# Altium PCB SB0037A.PcbDoc (part 7 of 7)
Units mil, origin at the board's own origin, x right, y up, seen from the top; angles counter-clockwise.
Board outline 2872.5 x 4560 mil, 6 copper layers (Top Layer, L2, L3, L4, L5, Bottom Layer), stack 30.268 mil thick; 282 components, 292 nets, 1320 pads, 687 vias.
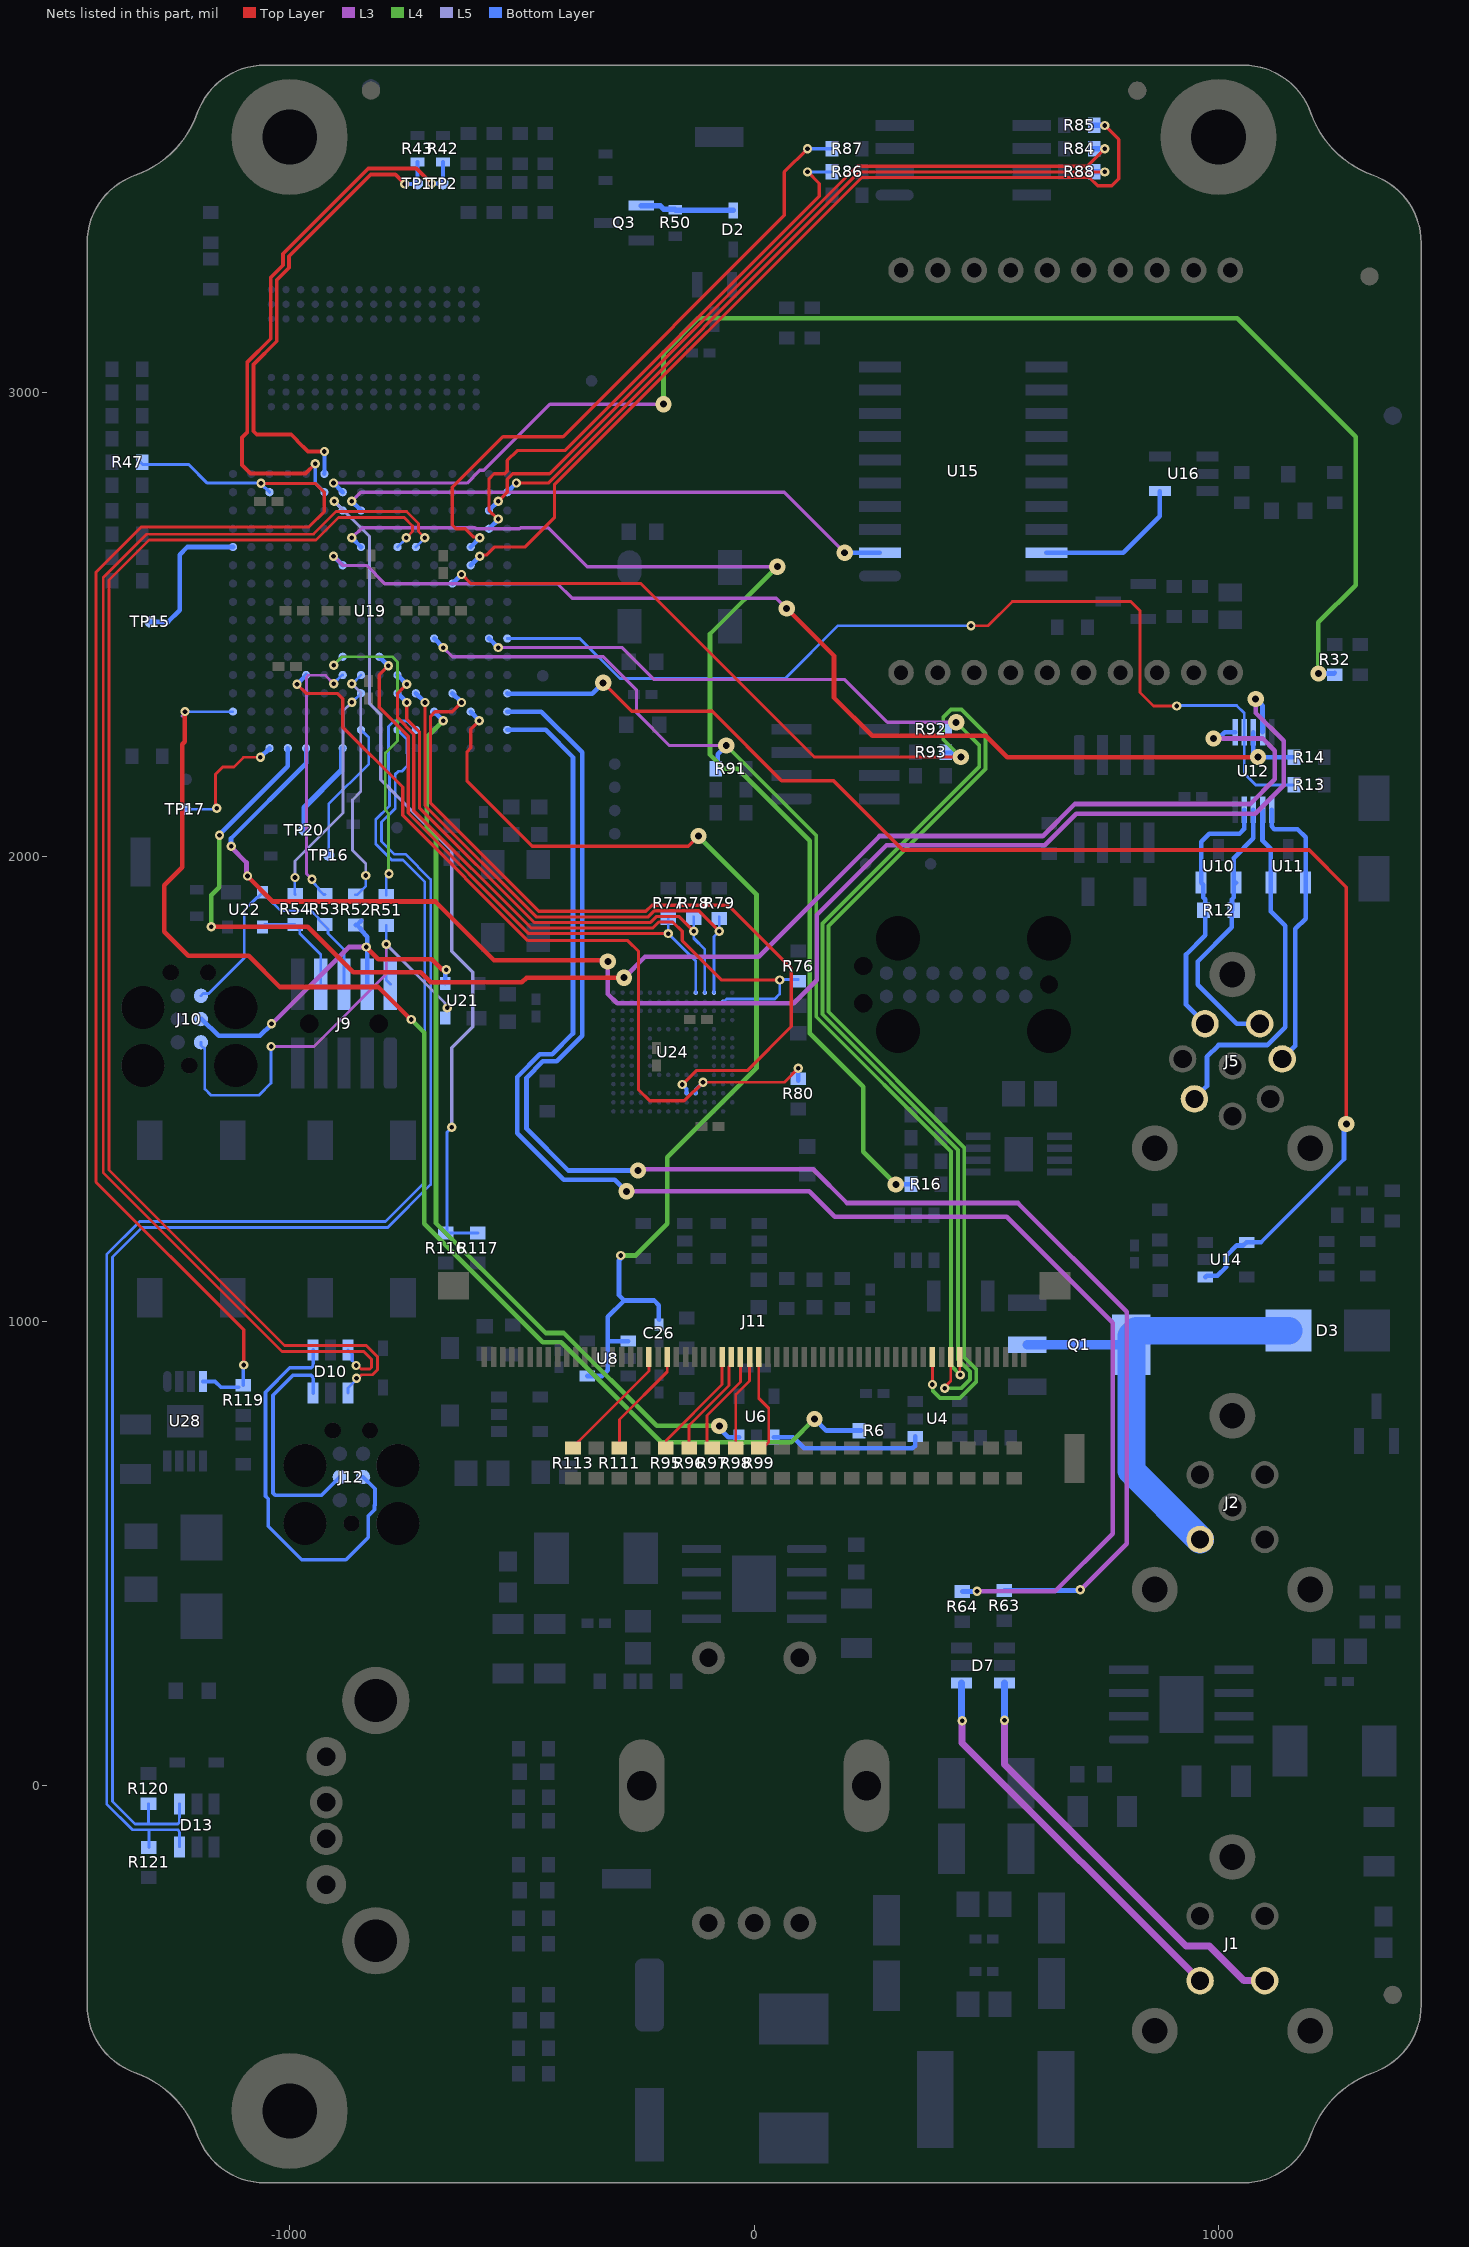
[diagram p9: the nets of this part, all layers, seen from the top]

## Via types
v1: diameter 20, hole 10, Top Layer to Bottom Layer, tented both sides, 484 vias
v2: diameter 35, hole 15, Top Layer to Bottom Layer, tented both sides, 197 vias
v3: diameter 20, hole 10, Top Layer to Bottom Layer, tented top, 6 vias

## Nets (pads, with @x,y where several pads share a name; then routed paths per layer and width w, separated by ;. In a path a pad name is that pad's centre, name@x,y a point inside that pad or via, vN(x,y) a via of type N, cw(c..) or ccw(c..) an arc to the next point about the centre after c; other vN are vias at no path point) (continued)
NetTP15_1: TP15.1 U19.T12 | length 315.1
  Bottom Layer w10: TP15.1@-1300,2506 -1262,2506 -1237,2531 -1237,2651 -1220.68,2667.32 U19.T12@-1122.05,2667.32
NetTP16_1: TP16.1 U19.J2 | length 312.6
  Bottom Layer w6: TP16.1@-916,2004 -916,2114 -829.6,2200.4 -829.6,2257.08 -833.51,2261 -833.83,2261 U19.J2@-846.46,2273.62
NetTP17_1: TP17.1 U19.P1 | length 283.1
  Top Layer w6: v1(-1157,2105) -1160,2108 -1160,2178 -1144,2194 -1120,2194 -1099.43,2214.57 v1(-1062.99,2214.57)
  Bottom Layer w5: TP17.1@-1225,2103 -1159,2103 v1(-1157,2105)
  Bottom Layer w10: v1(-1062.99,2214.57) U19.P1@-1043.31,2234.25
NetTP20_1: TP20.1 U19.K1 | length 210.7
  Bottom Layer w12: TP20.1@-969,2058 -969,2106 -888.14,2186.86 -888.14,2227.89 -886.92,2229.12 -886.92,2233.16 U19.K1@-885.83,2234.25
NetU4_1: U4.1 U6.1 | length 336.7
  Bottom Layer w10: U6.1@42.4,750.71 84.29,750.71 108.23,726.77 340.91,726.77 346.77,732.63 U4.1@346.77,752.6
NetU15_19: U15.19 U16.4 | length 330.9
  Bottom Layer w10: U15.19@629.13,2655 795,2655 873.42,2733.42 U16.4@873.42,2787.6
PCLK: J11.40 R111.1 | length 242.3
  Top Layer w6: R111.1@-290,723.54 -290,788.74 -187.01,891.73 J11.40@-187.01,923.23
POR: D2.2 Q3.1 R50.2 | length 201.9
  Bottom Layer w12: Q3.1@-242.6,3402.4 -202.4,3402.4 -194.8,3394.8 -171.26,3394.8 R50.2@-170,3393.54 -168.58,3392.13 D2.2@-44.99,3392.13
R0: J11.34 R95.1 | length 249.8
  Top Layer w6: R95.1@-190,723.54 -188.98,724.57 -188.98,744.09 -68.9,864.17 J11.34@-68.9,923.23
R1: J11.33 R96.1 | length 237.3
  Top Layer w6: R96.1@-140,723.54 -140,776.1 -53.99,862.11 -53.99,902.7 -49.21,907.48 J11.33@-49.21,923.23
R2: J11.32 R97.1 | length 234.3
  Top Layer w6: R97.1@-90,723.54 -101.5,735.04 -101.5,797.63 -29.53,869.6 J11.32@-29.53,923.23
R3: J11.31 R98.1 | length 212.2
  Top Layer w6: R98.1@-40,723.54 -39.37,724.17 -39.37,842.52 -9.84,872.05 J11.31@-9.84,923.23
R4: J11.30 R99.1 | length 220.4
  Top Layer w6: J11.30@9.84,923.23 9.84,834.63 31.5,812.97 31.5,740.12 14.92,723.54 R99.1@10,723.54
RXN_0: J5.2 R12.2 U10.1 U12.8 | length 601.4
  Bottom Layer w10: U10.1@1037.4,1944.57 U10.1@1032.66,1939.83 ; U12.8@1075,2101.34 1075,2040 1032.66,1997.66 U10.1@1032.66,1939.83 ; J5.2@1088.77,1640.85 1039.15,1640.85 955,1725 955,1775 1028.54,1848.54 1028.54,1885 1028.91,1885.36 1028.91,1908.91 1032.66,1912.66 U10.1@1032.66,1939.83
RXP_0: J5.1 R12.1 U10.2 U12.9 | length 574.7
  Bottom Layer w10: J5.1@970.83,1640.85 930,1681.68 930,1790 971.46,1831.46 971.46,1885 971.09,1885.36 971.09,1908.91 967.34,1912.66 967.34,1939.83 U10.2@962.6,1944.57 962.6,2032.6 980,2050 1045,2050 1055.31,2060.31 U12.9@1055.31,2101.34
SCL: R42.2 TP2.1 U19.L15 | length 1214.7
  Top Layer w8: v1(-944.93,2846.6) -965.74,2825.79 -1084.39,2825.79 -1102.68,2844.08 -1102.68,2903.32 -1091.07,2914.93 -1091.07,3065.64 -1040.87,3115.84 -1040.87,3247.77 -1014.45,3274.2 -1014.45,3298.54 -830.71,3482.28 -726.97,3482.28 v1(-694.68,3450)
  Bottom Layer w8: v1(-944.93,2846.6) -944.93,2805.16 U19.L15@-925.2,2785.43 ; v1(-694.68,3450) TP2.1@-670,3450 R42.2@-670,3496.46
SD_CLK: U19.D4 U24.M6 | length 1663.5
  Top Layer w7: v1(-629.92,2332.68) -649.79,2312.81 -687.19,2312.81 -696.66,2303.34 -696.66,2115.6 -464.06,1883 -232.91,1883 -219.91,1896 -56,1896 80,1760 80,1635 -15,1540 -125,1540 v1(-155,1510)
  Bottom Layer w8: v1(-155,1510) -145.47,1500.47 U24.M6@-145.47,1491.42
  Bottom Layer w10: U19.D4@-649.61,2352.36 v1(-629.92,2332.68)
SD_CMD: R80.1 U19.M5 U24.M5 | length 1810.1
  Top Layer w6: v1(-110,1515) 65,1515 v1(95,1545)
  Top Layer w7: v1(-984.25,2372.05) -964.38,2352.18 -897.44,2352.18 -885.64,2340.38 -885.64,2279.64 -756.66,2150.66 -756.66,2089.69 -486.97,1820 -272,1820 -249,1797 -249,1499 -225,1475 -150,1475 v1(-110,1515)
  Bottom Layer w8: U24.M5@-125.79,1491.42 -125.79,1499.21 v1(-110,1515)
  Bottom Layer w10: v1(-984.25,2372.05) U19.M5@-964.57,2391.73 ; R80.1@95,1518.54 v1(95,1545)
SD_DATA0: R79.1 U19.F4 U24.A3 | length 1174.6
  Top Layer w7: v1(-708.66,2332.68) -708.66,2110.63 -469.03,1871 -227.94,1871 -214.94,1884 -119,1884 v1(-75,1840)
  Bottom Layer w6: U24.A3@-86.42,1707.95 -86.42,1828.58 v1(-75,1840) R79.1@-75,1871.46
  Bottom Layer w10: U19.F4@-728.35,2352.36 v1(-708.66,2332.68)
SD_DATA1: R78.1 U19.G4 U24.A4 | length 1151.1
  Top Layer w7: v1(-748.03,2332.68) -748.03,2296.97 -720.66,2269.6 -720.66,2105.66 -474,1859 -222.97,1859 -209.97,1872 -162,1872 v1(-130,1840)
  Bottom Layer w6: R78.1@-130,1871.46 v1(-130,1840) -130,1825 -106.1,1801.1 U24.A4@-106.1,1707.95
  Bottom Layer w10: U19.G4@-767.72,2352.36 v1(-748.03,2332.68)
SD_DATA2: R77.1 U19.H6 U24.A5 | length 1233.7
  Top Layer w7: v1(-787.4,2411.42) -806.9,2391.92 -806.9,2321.9 -744.66,2259.66 -744.66,2094.66 -485,1835 v1(-185,1835)
  Bottom Layer w6: R77.1@-185,1871.46 v1(-185,1835) -125.79,1775.79 U24.A5@-125.79,1707.95
  Bottom Layer w10: U19.H6@-807.09,2431.1 v1(-787.4,2411.42)
SD_DATA3: R76.1 U19.G5 U24.B2 | length 1483.4
  Top Layer w7: v1(-748.03,2372.05) -767.72,2352.36 -767.72,2299.69 -732.66,2264.63 -732.66,2099.63 -480.03,1847 -218,1847 -205,1860 -175,1860 -155,1840 -155,1820 -70,1735 v1(55,1735)
  Bottom Layer w6: U24.B2@-66.73,1688.27 -65.75,1688.27 -59.61,1694.41 44.41,1694.41 55,1705 v1(55,1735) 56.46,1736.46 R76.1@95,1736.46
  Bottom Layer w10: U19.G5@-767.72,2391.73 v1(-748.03,2372.05)
SDA: R43.2 TP1.1 U19.L16 | length 1033
  Top Layer w8: v1(-925.2,2873.03) -960.63,2873.03 -983.99,2896.39 -983.99,2897.2 -996.44,2909.66 -1071.08,2909.66 -1078.07,2916.65 -1078.07,3060.26 -1027.87,3110.46 -1027.87,3242.39 -1001.45,3268.81 -1001.45,3293.16 -825.32,3469.28 -772.43,3469.28 v1(-751.97,3448.82)
  Bottom Layer w8: U19.L16@-925.2,2824.8 -924.88,2825.12 -924.88,2872.72 v1(-925.2,2873.03) ; v1(-751.97,3448.82) -726.18,3448.82 TP1.1@-725,3450 R43.2@-725,3496.46
SENSOR_CUR_FB: U14.1 U14.4 U19.A4 | length 3004
  Top Layer w8: v2(-325,2375) -263.5,2313.5 -90.3,2313.5 59.2,2164 171,2164 320,2015 1195,2015 1275,1935 v2(1275,1425)
  Bottom Layer w8: 1091.4,1170.4 1270,1349
  Bottom Layer w10: U19.A4@-531.5,2352.36 -530.18,2351.05 -348.95,2351.05 v2(-325,2375) ; U14.1@971.71,1095.6 974.69,1098.58 997.58,1098.58 1016,1117 1016,1140 1039.59,1163.59 1053.48,1163.59 U14.4@1060.29,1170.4 1091.4,1170.4 ; 1270,1349 1270,1406.64 1270.22,1406.86 1270.22,1420.22 v2(1275,1425)
SENSOR_ENABLE: R16.1 U19.J12 | length 2599.4
  L3 w7: v1(-866.14,2687.01) -844.15,2709 -600.75,2709 -598.63,2706.88 -505.1,2706.88 -502.98,2709 -443.6,2709 -359.6,2625 v2(50,2625)
  L4 w10: v2(50,2625) -95,2480 -95,2220 -65,2190 -35,2190 120,2035 120,1620 235,1505 235,1365 v2(305,1295)
  Bottom Layer w10: v1(-866.14,2687.01) U19.J12@-846.46,2667.32 ; v2(305,1295) R16.1@341.46,1295
SENSOR_RX_EN: R13.2 U12.2 U19.A7 | length 2142.3
  Top Layer w6: v1(467,2498) 504,2498 556,2550 811,2550 831,2530 831,2354 860,2325 v1(910,2325)
  Bottom Layer w6: U19.A7@-531.5,2470.47 -375.47,2470.47 -289,2384 67,2384 181,2498 v1(467,2498) ; v1(910,2325) 911,2326 1039,2326 1055.31,2309.69 U12.2@1055.31,2268.66 1055.31,2179.69 1080,2155 R13.2@1162.52,2155
SENSOR_RX_IN: U12.1 U19.N1 | length 3229.3
  Top Layer w10: v1(-1169,1850) -961,1850 -863,1752 -718,1752 -696,1730 -500,1730 -490,1740 v2(-280,1740)
  L3 w10: v2(-280,1740) -235,1785 10,1785 270,2045 621,2045 690,2114 1067.79,2114 1121,2167.21 1121,2229 1095,2255 v2(989.34,2255)
  L4 w10: v1(-1169,1850) -1169,1918 -1152,1935 -1152,2046 v1(-1151,2047)
  Bottom Layer w10: v1@-1151.5,2047.5 -1003.94,2195.06 U19.N1@-1003.94,2234.25 ; v2(989.34,2255) 999.7,2255 1013.36,2268.66 U12.1@1035.63,2268.66
SENSOR_TX_EN: R14.1 U12.3 U19.K11 | length 2389.5
  Top Layer w10: v2(70,2535) 172,2433 172,2343 254,2261 499,2261 545,2215 v2(1085,2215)
  L3 w7: v1(-905.51,2647.64) -885.64,2627.77 -834.48,2627.77 -795.11,2588.4 -423.4,2588.4 -392,2557 48,2557 v2(70,2535)
  Bottom Layer w10: v1(-905.51,2647.64) U19.K11@-885.83,2627.95 ; U12.3@1075,2268.66 1075,2225.12 1085,2215.12 v2(1085,2215) R14.1@1166.46,2215
SENSOR_TX_OUT: U12.4 U19.M1 | length 3306.9
  Top Layer w10: v1(-1090.86,1958.86) -1036,1904 -686,1904 -560,1778 -318,1778 v2(-315,1775)
  L3 w10: v1(-1126,2023) -1126,2021 -1093,1988 -1093,1961 v1(-1090.86,1958.86) ; v2(-315,1775) -315,1705 -295,1685 85,1685 135,1735 135,1875 285,2025 626,2025 694,2093 1079,2093 1140,2154 1140,2250 1080,2310 v2(1080,2340)
  Bottom Layer w10: v1(-1126,2023) -1126.31,2023.31 -1126.31,2039.69 -964.57,2201.43 U19.M1@-964.57,2234.25 ; v2(1080,2340) 1094.68,2325.32 U12.4@1094.68,2268.66
SOL_N: D3.1 J2.3 Q1.2 Q1.4 | length 1066.8
  Bottom Layer w20: Q1.2@587.79,950 Q1.4@812.2,950
  Bottom Layer w60: J2.3@960.2,530.45 812.2,678.45 Q1.4@812.2,950 812.2,968.66 823.54,980 D3.1@1150.35,980
SOLENOID_CUR_FB: C26.2 U8.1 U8.4 U19.C3 | length 2301.7
  Top Layer w7: v1(-591.56,2293.42) -610.05,2274.93 -610.05,2234.95 -618,2227 -618,2163 -478,2023 -142,2023 v2(-120,2045)
  L4 w10: v1(-287,1142) -255,1142 -187,1210 -187,1353 5,1545 5,1920 v2(-120,2045)
  Bottom Layer w10: U19.C3@-610.24,2312.99 -610.24,2312.54 -591.56,2293.87 v1(-591.56,2293.42) ; U8.4@-359.29,882.6 -327.4,882.6 -315,895 -315,955 ; v1(-287,1142) -288.91,1140.09 -288.91,1133.23 -291,1131.14 -291,1056 -280,1045 ; U8.1@-270.71,957.4 -312.6,957.4 -315,955 ; C26.2@-204.01,1003.54 -205,1004.54 -205,1035 -215,1045 -280,1045 ; -315,955 -315,1010 -280,1045
SOLENOID_CUR_SP: U6.3 U19.E3 | length 1979.3
  L4 w10: v1(-669.29,2293.31) -705,2257.6 -705,2060 -685,2040 -685,1211.21 -448.79,975 -410,975 -210,775 v2(-75,775)
  Bottom Layer w10: U19.E3@-688.98,2312.99 v1(-669.29,2293.31) ; v2(-75,775) -75,770 -55.71,750.71 U6.3@-32.4,750.71
SOLENOID_ON: R6.1 U19.T3 | length 2835.7
  Top Layer w10: v1(-1225.39,2312.99) -1226,2312.39 -1226,2287.43 -1225.86,2287.29 -1225.86,2259.95 -1226,2259.81 -1226,2248 -1231,2243 -1231,1978 -1270,1939 -1270,1839 -1218,1787 -1088,1787 -1021,1720 -809,1720 -739,1650 v1(-738,1650)
  L3 w7: -1231.5,2303.37 -1225.39,2309.47 v1(-1225.39,2312.99)
  L4 w10: v1(-738,1650) -710,1622 -710,1210 -455,955 -415,955 -200,740 80,740 v2(130,790)
  Bottom Layer w5: v1(-1225.39,2312.99) U19.T3@-1122.05,2312.99
  Bottom Layer w10: v2(130,790) 155,765 R6.1@230,765
SPIFI_MISO: R86.2 U19.B13 | length 1220.4
  Top Layer w7: v1(-551.18,2727.75) -552.55,2727.75 -570.68,2745.88 -570.68,2814.32 -560.01,2824.99 -536.49,2824.99 -531.31,2830.17 -531.31,2853.69 -510,2875 -407.42,2875 140,3422.42 140,3450 v1(115,3475)
  Bottom Layer w6: v1(115,3475) R86.2@171.46,3475
  Bottom Layer w10: U19.B13@-570.87,2706.69 -551.18,2726.38 v1(-551.18,2727.75)
SPIFI_MOSI: R85.2 U19.C11 | length 1950.6
  Top Layer w7: v1(-590.55,2647.64) -588.13,2650.06 -576.34,2650.06 -558.89,2667.51 -492.49,2667.51 -430,2730 -430,2801.51 231.49,3463 722,3463 740,3445 770,3445 785,3460 785,3545 v1(755,3575)
  Bottom Layer w10: U19.C11@-610.24,2627.95 v1(-590.55,2647.64)
  Bottom Layer w12: R85.2@728.54,3575 v1(755,3575)
SPIFI_SCK: R84.2 U19.B14 | length 1691.1
  Top Layer w7: v1(-551.18,2765.75) -531.31,2785.62 -531.31,2813.2 -519.52,2824.99 -440.46,2824.99 221.55,3487 717,3487 v1(755,3525)
  Bottom Layer w10: U19.B14@-570.87,2746.06 v1(-551.18,2765.75)
  Bottom Layer w12: R84.2@728.54,3525 v1(755,3525)
SPIFI_SIO2: R87.2 U19.C12 | length 1357.9
  Top Layer w7: v1(-590.55,2687.01) -592.32,2688.77 -603.77,2688.77 -621.51,2706.51 -641.51,2706.51 -649.79,2714.79 -649.79,2796.06 -540.85,2905 -411.36,2905 65,3381.36 65,3475 v1(115,3525)
  Bottom Layer w7: v1(115,3525) R87.2@171.46,3525
  Bottom Layer w10: U19.C12@-610.24,2667.32 v1(-590.55,2687.01)
SPIFI_SIO3: R88.2 U19.A15 | length 1598.6
  Top Layer w7: v1(-511.81,2805.12) -443.36,2805.12 226.52,3475 v1(755,3475)
  Bottom Layer w10: U19.A15@-531.5,2785.43 v1(-511.81,2805.12)
  Bottom Layer w12: R88.2@728.54,3475 v1(755,3475)
SSP1_MISO: J11.8 R91.2 U19.E7 | length 2413.5
  Top Layer w6: J11.8@442.91,923.23 442.91,885.83 v1(443.9,884.84)
  L3 w7: v1(-669.29,2450.79) -649.42,2430.92 -324.92,2430.92 -253.14,2359.14 -253.14,2310.14 -183,2240 v2(-60,2240)
  L4 w8: v2(-60,2240) 134,2046 134,1656 423.9,1366.1 423.9,904.84 v1(443.9,884.84)
  Bottom Layer w10: U19.E7@-688.98,2470.47 v1(-669.29,2450.79) ; R91.2@-78.54,2190 -78.54,2221.46 v2(-60,2240)
SSP1_MOSI: J11.9 R92.2 U19.B7 | length 2922.5
  Top Layer w6: v1(410.45,856.34) 410.45,858.29 423.23,871.06 J11.9@423.23,923.23
  L3 w7: v1(-551.18,2450.79) -283.79,2450.79 -215,2382 195,2382 287,2290 v2(435,2290)
  L4 w8: v1(410.45,856.34) 446.34,856.34 465,875 465,892.02 439.18,917.84 439.18,1369.2 147,1661.38 147,1857 485,2195 485,2240 v2(435,2290)
  Bottom Layer w10: U19.B7@-570.87,2470.47 v1(-551.18,2450.79)
SSP1_SCK: J11.11 R93.2 U19.D10 | length 3382
  Top Layer w6: v1(383.86,864.17) 383.86,865.16 J11.11@383.86,923.23
  Top Layer w7: v1(-629.92,2608.27) -610.42,2588.77 -243.77,2588.77 130,2215 v2(445,2215)
  L4 w8: v1(383.86,864.17) 384.9,863.13 384.9,850.1 400,835 443.38,835 478,869.62 478,897.41 452.18,923.23 452.18,1374.59 160,1666.77 160,1851.62 498,2189.62 498,2265.89 446.39,2317.5 423.61,2317.5 407.5,2301.39 407.5,2252.5 v2(445,2215)
  Bottom Layer w8: R93.2@408.54,2225 427.69,2225 437.69,2215 v2(445,2215)
  Bottom Layer w10: U19.D10@-649.61,2588.58 v1(-629.92,2608.27)
SWDCLK/TCLK: J9.4 J10.4 R52.1 U21.3 | length 826.1
  Top Layer w10: v1(-835,1806) -809,1780 -694.49,1780 -673.4,1758.91 -664.91,1758.91 v3(-663,1757)
  L3 w10: v1(-1039,1641) -1038,1641 -873,1806 v1(-835,1806)
  Bottom Layer w10: J10.4@-1191,1651 -1189,1651 -1153,1615 -1064,1615 -1039,1640 v1(-1039,1641) ; R52.1@-858,1853.52 R52.1@-855.05,1853.52 ; R52.1@-846.27,1862.3 R52.1@-855.05,1853.52 ; J9.4@-833,1726 -833,1828.52 -846.27,1841.79 -846.27,1844.74 R52.1@-855.05,1853.52 ; U21.3@-665,1727.8 -665,1757 v3(-663,1757)
SWDCLK/TCLK_MCU: R52.2 U19.J5 | length 520.3
  L5 w6: v1(-866.14,2373) -847,2353.86 -847,2141 -865,2123 -865,2014.36 -836,1985.36 v1(-836,1960)
  Bottom Layer w6: v1(-866.14,2373) -865,2373 -846.46,2391.54 U19.J5@-846.46,2391.73 ; R52.2@-858,1918.48 -855.05,1918.48 -844.27,1929.26 -836,1937.53 v1(-836,1960)
SWIO/TMS: J9.2 J10.2 R51.1 U21.2 | length 1040
  L3 w6: v1(-1040,1592) -948,1592 -792,1748 v1(-792,1812)
  L5 w6: v1(-792,1812) -665.44,1685.44 -665.44,1683.22 -661,1678.79 v3(-661,1675)
  Bottom Layer w6: J10.2@-1191,1601 -1191,1594.24 -1182.67,1585.91 -1182.67,1500.67 -1169,1487 -1066,1487 -1040,1513 v1(-1040,1592) ; R51.1@-792,1852.52 v1(-792,1812) -792,1735 J9.2@-783,1726
SWIO/TMS_MCU: R51.2 U19.K6 | length 696.2
  L4 w6: v1(-905,2413) -887,2431 -779,2431 -768,2420 -768,2250 -794,2224 -794,2100.73 -787,2093.73 -787,1965 v1(-786,1964)
  Bottom Layer w6: v1(-905,2413) -886.9,2431.1 U19.K6@-885.83,2431.1 ; R51.2@-792,1917.48 -792,1960.49 -789.51,1960.49 v1(-786,1964)
SWO/TDO: J9.6 J10.6 R53.1 U22.2 | length 594.3
  Bottom Layer w6: J10.6@-1191,1701 -1186.22,1705.78 -1174.22,1705.78 -1098,1782 -1098,1885 -1069.78,1913.22 -1067.81,1913.22 U22.2@-1059,1922.03 ; U22.2@-1059,1924 U22.2@-1059,1922.03 ; J9.6@-883,1726 -883,1801 -917.25,1835.25 -917.25,1844.82 -937.73,1865.3 -937.73,1868.25 -953.48,1884 -1019,1884 -1048.22,1913.22 -1050.19,1913.22 U22.2@-1059,1922.03
SWO/TDO_MCU: R53.2 U19.K5 | length 581.6
  L3 w6: v1(-952,1952) -963.88,1963.88 -963.88,2387.53 -960.37,2391.05 -923.05,2391.05 v1(-905,2373)
  Bottom Layer w6: v1(-952,1952) -949.32,1949.32 -949.32,1944.8 -937.73,1933.21 -937.73,1930.26 -926.95,1919.48 R53.2@-924,1919.48 ; v1(-905,2373) -905,2374 -887.27,2391.73 U19.K5@-885.83,2391.73
TDI: J9.8 R54.1 U22.3 | length 223.9
  Bottom Layer w6: U22.3@-1059,1849.2 -1053.68,1854.52 -989.03,1854.52 -978.25,1843.74 -978.25,1835.25 -933,1790 J9.8@-933,1726
TDI_MCU: R54.2 U19.J4 | length 492.4
  L5 w6: v1(-988.65,1955.65) -988.65,1991.35 -885,2095 -885,2314 v1(-866,2333)
  Bottom Layer w6: v1(-988.65,1955.65) -989,1955.3 -989,1920.48 R54.2@-988,1919.48 ; v1(-866,2333) -865.82,2333 U19.J4@-846.46,2352.36
TXN_0: J5.6 U11.2 U12.7 | length 785
  Bottom Layer w10: J5.6@948.09,1479.02 948.09,1479.89 975,1506.8 975,1570 1000,1595 1105,1595 1143.5,1633.5 1143.5,1851.81 1112.6,1882.71 U11.2@1112.6,1944.57 1112.6,2017.4 1094.68,2035.32 U12.7@1094.68,2101.34
TXP_0: J5.3 U11.1 U12.6 | length 616.5
  Bottom Layer w10: U12.6@1114.37,2101.34 1114.37,2065.86 1120.23,2060 1170,2060 1187.4,2042.6 U11.1@1187.4,1944.57 1187.4,1867.4 1165,1845 1165,1593.1 J5.3@1137.01,1565.12
U0_RXD: R64.2 U19.A2 | length 3321.2
  L3 w10: v2(-275,1280) 118.79,1280 173.79,1225 543.79,1225 772,996.79 772,543.21 647.79,419 v1(480,419)
  Bottom Layer w10: U19.A2@-531.5,2273.62 -448.62,2273.62 -390,2215 -390,1620 -435,1575 -461.21,1575 -510,1526.21 -510,1405 -410,1305 -300,1305 v2(-275,1280) ; R64.2@448,418.48 479.48,418.48 v1(480,419)
U0_RXD_IN: D7.4 J1.4 | length 853.8
  L3 w15: v1(448,140) 448,92.68 J1.4@960.2,-419.53
  Bottom Layer w15: D7.4@446.74,221.6 446.74,141.26 v1(448,140)
U0_TXD: R63.2 U19.A3 | length 3337.3
  L3 w10: v2(-250,1325) -247,1328 127,1328 200,1255 568,1255 802,1021 802,521 v1@702.5,421.5
  Bottom Layer w10: U19.A3@-531.5,2312.99 -457.99,2312.99 -370,2225 -370,1615 -425,1560 -455,1560 -490,1525 -490,1415 -400,1325 v2(-250,1325) ; R63.2@539,420.48 697.48,420.48 699,422 v1(702,422)
U0_TXD_OUT: D7.3 J1.3 | length 928.9
  L3 w15: v1(539,141) 539,46 930,-345 980,-345 1054.53,-419.53 J1.3@1099.4,-419.53
  Bottom Layer w15: v1(539,141) 539.26,141.26 D7.3@539.26,221.6
UART2_RX: R32.2 U19.K15 | length 3124.2
  L3 w7: v1(-905.51,2805.12) -618.13,2805.12 -590.73,2832.52 -582.22,2832.52 -439.74,2975 v2(-195,2975)
  L4 w10: v2(-195,2975) -195,3085 -120,3160 1040,3160 1295,2905 1295,2585 1215,2505 v2(1215,2395)
  Bottom Layer w10: v1(-905.51,2805.12) U19.K15@-885.83,2785.43 ; v2(1215,2395) 1248.54,2395 R32.2@1250,2396.46
UART2_TX: U15.2 U19.J14 | length 1226.9
  L3 w7: v1(-866.14,2765.75) -846.64,2785.25 64.75,2785.25 v2(195,2655)
  Bottom Layer w10: v1(-866.14,2765.75) U19.J14@-846.46,2746.06 ; v2(195,2655) U15.2@270.87,2655
USB1_VBUS: R116.2 R117.2 U19.K14 | length 1815.6
  L5 w7: v1(-904,2766) -828,2690 -828,2330 -804,2306 -804,2166 -651,2013 -651,1797 -606,1752 -606,1634.55 -651,1589.55 v1(-651,1418)
  Bottom Layer w7: v1(-904,2766) -885.83,2747.83 U19.K14@-885.83,2746.06 ; v1(-651,1418) -651,1417.68 -661.28,1407.4 -661.28,1190.48 R117.2@-595,1190.48
USB_DEV_D_N: D10.6 J12.3 | length 512.3
  Bottom Layer w8: D10.6@-949.4,845.74 -949.4,879.31 -954.09,884 -993,884 -1036,841 -1036,630.69 -1031.31,626 -931,626 J12.3@-892,665
USB_DEV_D_P: D10.1 J12.4 | length 862.2
  Bottom Layer w8: D10.1@-949.4,938.26 -949.4,904.69 -954.09,900 -999.63,900 -1052,847.63 -1052,624.06 -1046,618.06 -1046,559 -974,487 -879,487 -831,535 -831,580.9 -817.25,594.65 -817.25,603.69 -816.5,604.44 -816.5,639.5 J12.4@-842,665
USB_DEVICE_D_N: D10.4 U19.G12 | length 2911
  Top Layer w6: v3(-856.07,877.89) -852.81,877.89 -845.56,885.14 -821.9,885.14 -811,896.04 -811,923.82 -835.18,948 -1011,948 -1389,1326 -1389,2596 -1302.6,2682.4 -943.6,2682.4 -895,2731 -753.3,2731 -735.3,2713 -735.3,2700.7 v3(-749,2687)
  Bottom Layer w6: D10.4@-874.6,845.74 -874.6,856.57 -856.07,875.1 v3(-856.07,877.89) ; U19.G12@-767.72,2667.32 -749,2686.04 v3(-749,2687)
USB_DEVICE_D_P: D10.3 U19.F12 | length 2933.8
  Top Layer w6: v3(-857,905) -853.74,905 -846.49,897.74 -827.11,897.74 -823.6,901.26 -823.6,918.6 -840.4,935.4 -1016.22,935.4 -1401.6,1320.78 -1401.6,2601.22 -1307.82,2695 -948.82,2695 -900.22,2743.6 -748.08,2743.6 -722.7,2718.22 -722.7,2700.7 v3(-709,2687)
  Bottom Layer w6: D10.3@-874.6,938.26 -865.79,929.45 -865.79,915.51 -857,906.73 v3(-857,905) ; U19.F12@-728.35,2667.32 -709,2686.67 v3(-709,2687)
USB_HOST_D_N: D13.4 R120.2 U19.G2 | length 3243.2
  Bottom Layer w6: R120.2@-1304,-38.48 -1304,-82 ; D13.4@-1237.4,-38.74 -1237.4,-78.4 -1241,-82 -1304,-82 ; U19.G2@-767.72,2273.62 -747.2,2253.11 -747.2,2223.38 -747,2223.17 -747,2196.07 -758.72,2184.35 -766.31,2184.35 -772.7,2177.97 -772.7,2104.48 -802,2075.18 -802,2033 -775,2006 -750.78,2006 -696.4,1951.62 -696.4,1294.78 -788.78,1202.4 -1317.6,1202.4 -1381.4,1138.6 -1381.4,-33.6 -1333,-82 -1304,-82
USB_HOST_D_P: D13.3 R121.2 U19.F2 | length 3307.6
  Bottom Layer w6: R121.2@-1303,-132.52 -1303,-94.6 ; D13.3@-1237.4,-131.26 -1237.4,-98.11 -1240.92,-94.6 -1303,-94.6 ; U19.F2@-728.35,2273.62 -747.2,2292.48 -775.53,2292.48 -787,2281.01 -787,2181 -785.3,2179.3 -785.3,2109.7 -814.6,2080.4 -814.6,2027.78 -780.22,1993.4 -756,1993.4 -709,1946.4 -709,1300 -794,1215 -1322.82,1215 -1394,1143.82 -1394,-38.82 -1338.22,-94.6 -1303,-94.6
USB_HOST_PWR_EN: R47.1 R119.2 U19.P15 U28.4 | length 3000.9
  Top Layer w7: v1(-1099,906) -1099,982 -1417,1300 -1417,2613 -1319.5,2710.5 -958.5,2710.5 -925.38,2743.62 -925.38,2785.38 -944,2804 -1061.37,2804 v1(-1061.87,2804.5)
  Bottom Layer w7: R47.1@-1321.46,2850 -1316.46,2845 -1217,2845 -1177,2805 -1062.87,2805 -1062.37,2804.5 v1(-1061.87,2804.5) ; R119.2@-1100,862.48 -1100,905 v1(-1099,906) ; v1@-1061.87,2804 U19.P15@-1043.31,2785.43
  Bottom Layer w8: U28.4@-1186.61,870.63 -1160.63,870.63 -1148.54,858.54 R119.2@-1110,858.54
VS: J11.42 R113.1 | length 269.5
  Top Layer w6: R113.1@-390,723.54 -386.46,723.54 -379.62,730.39 -379.62,740.38 -226.38,893.62 J11.42@-226.38,923.23
pads on no net: D5.2 FID1.1 FID2.1 FID3.1 FID4.1 FID5.1 FID6.1 FID7.1 FID8.1 J1.M J2.M J5.M J6.0 J7.4 J7.6 J8.11 J8.13 J8.14 J8.15 J8.17 J8.18 J8.19 J8.20 J9.3 J9.7 J9.A J10.A J10.B J10.C J10.D J10.E J10.F J10.G J11. J11.7 J11.51 J11.52 J11.53 J11.54 J11.55 J11.56 J11.57 J12.2 J12.6 J12.A J12.B J12.C J12.D J12.E J12.F J12.G U1.4 U1.5@920,175 U3.4 U3.5@0,435 U5.5 U16.1 U17.5 U19.A9 U19.A10 U19.A11 U19.A12 U19.A16 U19.B6 U19.B9 U19.B10 U19.B11 U19.C9 U19.C13 U19.C15 U19.D6 U19.D8 U19.D12 U19.D14 U19.E1 U19.E6 U19.E9 U19.E10 U19.E11 U19.E13 U19.F13 U19.G13 U19.H11 U19.J13 U19.K13 U19.L1 U19.L3 U19.L5 U19.L6 U19.L12 U19.L13 U19.L14 U19.M2 U19.M6 U19.M7 U19.M8 U19.M9 U19.M10 U19.M11 U19.M12 U19.N6 U19.N8 U19.N10 U19.N12 U19.N14 U19.N15 U19.P11 U19.P12 U19.P14 U19.R5 U19.R14 U19.R15 U19.T1 U19.T10 U20.1 U23.E3 U23.E7 U23.H3 U23.H7 U23.K2 U23.K3 U24.A1 U24.A2 U24.A7 U24.A8 U24.A9 U24.A10 U24.A11 U24.A12 U24.A13 U24.A14 U24.B3 U24.B4 U24.B5 U24.B6 U24.B7 U24.B8 U24.B9 U24.B10 U24.B11 U24.B12 U24.B13 U24.B14 U24.C1 U24.C3 U24.C5 U24.C7 U24.C8 U24.C9 U24.C10 U24.C11 U24.C12 U24.C13 U24.C14 U24.D1 U24.D2 U24.D4 U24.D12 U24.D13 U24.D14 U24.E3 U24.E5 U24.E8 U24.E9 U24.E10 U24.E12 U24.E13 U24.E14 U24.F1 U24.F2 U24.F3 U24.F10 U24.F12 U24.F13 U24.F14 U24.G1 U24.G2 U24.G3 U24.G10 U24.G12 U24.G13 U24.G14 U24.H1 U24.H2 U24.H3 U24.H5 U24.H12 U24.H13 U24.H14 U24.J1 U24.J2 U24.J3 U24.J12 U24.J13 U24.J14 U24.K1 U24.K2 U24.K3 U24.K6 U24.K7 U24.K10 U24.K12 U24.K13 U24.K14 U24.L1 U24.L2 U24.L3 U24.L12 U24.L13 U24.L14 U24.M1 U24.M2 U24.M3 U24.M7 U24.M8 U24.M9 U24.M10 U24.M11 U24.M12 U24.M13 U24.M14 U24.N1 U24.N3 U24.N6 U24.N7 U24.N8 U24.N9 U24.N10 U24.N11 U24.N12 U24.N13 U24.N14 U24.P2 U24.P7 U24.P8 U24.P9 U24.P10 U24.P11 U24.P12 U24.P13 U24.P14 U28.8 Y1.2 Y1.3
copper on no net: | length 802.2
  Bottom Layer w5: v1(-1144.69,2588.58) -1122.05,2588.58
  Bottom Layer w10: v1(-1141.73,2214.57) -1122.05,2234.25 ; v1(-1023.62,2490.16) -1003.94,2509.84 ; v1(-1023.62,2608.27) -1003.94,2588.58 ; v1(-984.25,2253.94) -964.57,2273.62 ; v1(-984.25,2490.16) -964.57,2509.84 ; v1(-984.25,2608.27) -964.57,2588.58 ; v1(-984.25,2647.64) -964.57,2627.95 ; v1(-944.88,2293.31) -925.2,2312.99 ; v1(-944.88,2372.05) -925.2,2391.73 ; v1(-944.88,2765.75) -925.2,2746.06 ; -807.09,2627.95 v1(-787.4,2647.64) ; -688.98,2234.25 v1(-669.29,2214.57) ; -688.98,2431.1 v1(-669.29,2411.42) ; -649.61,2431.1 v1(-629.92,2411.42) ; -649.61,2667.32 v1(-629.92,2687.01) ; -649.61,2746.06 v1(-629.92,2765.75) ; -610.24,2549.21 v1(-590.55,2568.9) ; -610.24,2706.69 v1(-590.55,2726.38) ; -610.24,2785.43 v1(-590.55,2805.12) ; -570.87,2431.1 v1(-551.18,2411.42) ; -570.87,2549.21 v1(-551.18,2568.9) ; -570.87,2588.58 v1(-551.18,2608.27) ; -570.87,2627.95 v1(-551.18,2647.64) ; -531.5,2549.21 v1(-511.81,2568.9) ; -531.5,2588.58 v1(-511.81,2608.27) ; -531.5,2627.95 v1(-511.81,2647.64) ; -531.5,2667.32 v1(-511.81,2687.01) ; -531.5,2824.8 v1(-511.81,2844.49)

## Polygon pours and split planes (outlines as drawn)
GND on Bottom Layer "L5_GND" (solid, remove dead copper, pour order 15): 1447,-902 -1456.54,-902 -1456.54,3741.7 1447,3741.7
GND on Bottom Layer "B_GND" (solid, remove dead copper, pour order 6): 50,550 50,340 260,340 260,130 255,125 255,115 -575,115 -575,275 -395,275 -395,200 -370,200 -150,200 -150,325 -50,325 -50,550
GND on Bottom Layer "B_GND" (solid, remove dead copper, pour order 4): 975,325 865,325 865,75 785,75 785,-5 760,-5 760,-125 1025,-125 1125,-225 1380,-225 1380,-125 1275,-125 1275,-50 975,-50
+3V3 on L2 "L2_3V3" (solid, remove dead copper, pour order 2): 1432.09,-875.98 -1471.46,-875.98 -1471.46,3767.72 1432.09,3767.72
GND on L5 "L5_GND" (solid, remove dead copper, pour order 0): 1432.09,-875.98 -1471.46,-875.98 -1471.46,3767.72 1432.09,3767.72
GND on Top Layer "L5_GND" (solid, remove dead copper, pour order 8): 1432.09,-875.98 -1471.46,-875.98 -1471.46,3767.72 1432.09,3767.72
GND on L3 "L5_GND" (solid, remove dead copper, pour order 12): 1432.09,-875.98 -1471.46,-875.98 -1471.46,3767.72 1432.09,3767.72
GND on L4 "L5_GND" (solid, remove dead copper, pour order 14): 1432.09,-875.98 -1471.46,-875.98 -1471.46,3767.72 1432.09,3767.72

## Keep-outs
Keep-Out Layer:
  the board outline again, w1

## Other copper
Top Layer:
  pour cut-out: -175,152 -175,-208 182,-208 182,152
L3:
  pour cut-out: -175,152 -175,-208 182,-208 182,152
L4:
  pour cut-out: -175,152 182,152 182,-208 -175,-208
L2:
  pour cut-out: -175,152 182,152 182,-208 -175,-208
L5:
  pour cut-out: -175,152 -175,-208 182,-208 182,152
Bottom Layer:
  pour cut-out: -520,2225 -520,2835 -1130,2835 -1130,2225
  text "b" at 159,-207 h1000
  text "a" at 182,-208 h1000
  text "b" at -611,-838 h750
  text "b" at 1054.03,-839.05 h750

## Silkscreen, mask and mechanical layers (free items; w line width, h text height)
Top Overlay:
  text "t" at -619,-616 h600
  text "SB0036A  [CCA]" at -631,-734 h100
  text "2020-08-19" at 822,-800 h65
  text "SB0037A  [PCB]" at -628,-841 h100
Bottom Overlay:
  lines w10: 1072,3308 1294,3086 1294,2571 1074,2351
  text "GND" at 11,3634 h85
  text "GND" at -1415,1906 h85 r270
  text "BOOT" at -1418,1107 h100 r270
  text "RESET" at -1049,1076 h100 r270
  text "c" at 115,-95 h1000
  text "GND" at -194,-331 h85
  text "c" at -678,-821 h750
  text "c" at 987.03,-822.05 h750
  text "a" at -594,-855 h750
  text "a" at 1071.03,-856.05 h750
Bottom Solder:
  text "a" at 183,-208 h1000
  text "05" at -1335,-450 h50
  text "20" at -1335,-500 h50
  text "!" at -1235,-535 h250
  text "b" at -611,-838 h750
  text "b" at 1054.03,-839.05 h750
[8] Board Outline:
  the board outline again, w5
Bottom T_Court/B_Court (Mech16):
  circle w2: c1030,-350 r300
  circle w2: c1030,600 r300
  circle w2: c1030,1550 r300
[22] Notes:
  circle w0.5: c1029.8,1121.9 r27.56
  circle w0.5: c1099.4,855.45 r23.62
  circle w0.5: c960.2,855.45 r23.62
  circle w0.5: c960.2,994.65 r23.62
  circle w0.5: c1099.4,994.65 r23.62
  circle w0.5: c862.48,747.88 r27.56
  circle w0.5: c1197.12,747.88 r27.56
  circle w0.5: c862.48,1747.88 r27.56
  circle w0.5: c1197.12,1747.88 r27.56
  circle w0.5: c1111.51,1854.02 r19.68
  circle w0.5: c1029.8,1816.78 r19.68
  circle w0.5: c948.09,1854.02 r19.68
  circle w0.5: c922.59,1940.12 r19.68
  circle w0.5: c970.83,2015.85 r19.68
  circle w0.5: c1029.8,2121.9 r27.56
  circle w0.5: c1137.01,1940.12 r19.68
  circle w0.5: c1088.77,2015.85 r19.68
  circle w0.5: c1029.8,925.05 r23.6
  circle w0.5: c1029.8,1925.05 r19.7
  circle w0.5: c1197.12,-252.12 r27.55
  circle w0.5: c862.48,-252.12 r27.55
  circle w0.5: c1099.4,-5.35 r23.62
  circle w0.5: c960.2,-5.35 r23.62
  circle w0.5: c960.2,-144.55 r23.62
  circle w0.5: c1099.4,-144.55 r23.62
  circle w0.5: c1029.8,121.9 r27.55
  circle w0.5: c-813.7,-333.45 r45.5
  circle w0.5: c-920.7,-212.95 r18
  circle w0.5: c-920.7,63.05 r18
  circle w0.5: c-920.7,-35.45 r18
  circle w0.5: c-920.7,-114.45 r18
  circle w0.5: c-813.7,183.55 r45.5
  circle w5: c1000,-700 r59
  circle w5: c-1000,-700 r59
  circle w5: c1000,3550 r59
  circle w5: c-1000,3550 r59
  circle w5: c0,0 r118
  circle w5: c-98.5,-295 r19.5
  circle w5: c0,-295 r19.5
  circle w5: c-98.5,276 r19.5
  circle w5: c98.5,-295 r19.5
  circle w5: c98.5,276 r19.5
  lines w0.5: -600.4,1850.05 600.4,1850.05 600.4,2000.05 -600.4,2000.05 -600.4,1850.05 ; -85.71,1875.22 -28.29,1875.22 -28.29,1885.9 -70.65,1885.9 -26.95,1979.38 -81.71,1979.38 -81.71,1968.7 -42.02,1968.7 -85.71,1875.22 ; -6.92,1875.22 2.43,1875.22 2.43,1979.38 -6.92,1979.38 -6.92,1875.22 ; 29.14,1875.22 38.48,1875.22 38.48,1925.97 79.88,1925.97 79.88,1936.65 38.48,1936.65 38.48,1968.7 79.88,1968.7 79.88,1979.38 29.14,1979.38 29.14,1875.22
  lines w5: -1436.25,539.11 ccw(c-1383.75,652.55) -1383.75,527.55 1383.75,527.55 ccw(c1383.75,652.55) 1436.25,539.11 ; -1433.81,3348.91 cw(c-1351.25,3255.05) -1351.25,3380.05 1351.25,3380.05 cw(c1351.25,3255.05) 1433.81,3348.91 ; -375,-124.95 ccw(c-125,-124.95) -125,-374.95 125,-374.95 ccw(c125,-124.95) 375,-124.95 375,125.05 ccw(c125,125.05) 125,375.05 -125,375.05 ccw(c-125,125.05) -375,125.05 -375,-124.95 ; -260,-51 -189,-51 -189,51 -260,51 -260,-51 ; 189,-51 260,-51 260,51 189,51 189,-51
[33] Notes Shift (Mech33):
  circle w0.5: c1137.01,1565.12 r19.68
  circle w0.5: c1029.8,1550.05 r19.7
  circle w0.5: c1029.8,1441.78 r19.68
  circle w0.5: c1111.51,1479.02 r19.68
  circle w0.5: c1197.12,1372.88 r27.56
  circle w0.5: c862.48,422.88 r27.56
  circle w0.5: c960.2,530.45 r23.62
  circle w0.5: c960.2,669.65 r23.62
  circle w0.5: c1088.77,1640.85 r19.68
  circle w0.5: c1029.8,1746.9 r27.56
  circle w0.5: c970.83,1640.85 r19.68
  circle w0.5: c922.59,1565.12 r19.68
  circle w0.5: c948.09,1479.02 r19.68
  circle w0.5: c862.48,1372.88 r27.56
  circle w0.5: c1099.4,-280.35 r23.62
  circle w0.5: c1099.4,-419.55 r23.62
  circle w0.5: c1197.12,-527.12 r27.55
  circle w0.5: c1029.8,796.9 r27.56
  circle w0.5: c1029.8,600.05 r23.6
  circle w0.5: c1197.12,422.88 r27.56
  circle w0.5: c1099.4,530.45 r23.62
  circle w0.5: c1099.4,669.65 r23.62
  circle w0.5: c862.48,-527.12 r27.55
  circle w0.5: c1029.8,-153.1 r27.55
  circle w0.5: c960.2,-280.35 r23.62
  circle w0.5: c960.2,-419.55 r23.62
  circle w0.5: c-1000,-699.95 r59
  circle w0.5: c-813.7,-333.45 r45.5
  circle w0.5: c-920.7,-212.95 r18
  circle w0.5: c-920.7,63.05 r18
  circle w0.5: c-920.7,-35.45 r18
  circle w0.5: c-920.7,-114.45 r18
  circle w0.5: c-813.7,183.55 r45.5
  circle w0.5: c1000,3550.05 r59
  circle w0.5: c-1000,3550.05 r59
  circle w0.5: c98.5,-295 r19.5
  circle w0.5: c-98.5,-295 r19.5
  circle w0.5: c0,-295 r19.5
  circle w0.5: c-98.5,276 r19.5
  circle w0.5: c98.5,276 r19.5
  circle w0.5: c0,0 r24.53
  lines w0.5: -1436.25,-471.4 ccw(c-1281.25,-471.4) -1332.92,-617.53 cw(c-1406.25,-824.95) -1198.83,-751.62 ccw(c-1052.7,-699.95) -1052.7,-854.95 1052.7,-854.95 ccw(c1052.7,-699.95) 1198.83,-751.62 cw(c1406.25,-824.95) 1332.92,-617.53 ccw(c1281.25,-471.4) 1436.25,-471.4 1436.25,3321.5 ccw(c1281.25,3321.5) 1332.92,3467.63 cw(c1406.25,3675.05) 1198.83,3601.72 ccw(c1052.7,3550.05) 1052.7,3705.05 -1052.7,3705.05 ccw(c-1052.7,3550.05) -1198.83,3601.72 cw(c-1406.25,3675.05) -1332.92,3467.63 ccw(c-1281.25,3321.5) -1436.25,3321.5 -1436.25,-471.4 ; -260,-51 -260,51 -189,51 -189,-51 -260,-51 ; 189,-51 260,-51 260,51 189,51 189,-51

## Text inside footprints (layer, text, board x,y; h text height)
J1: Top Overlay "2" at 1136.1,-310.56 h60; Top Overlay "3" at 1136.1,-412.92 h60; Top Overlay "4" at 895.94,-408.98 h60; Top Overlay "1" at 899.88,-302.68 h60
J2: Top Overlay "5" at 1019.96,525.25 h60; Top Overlay "1" at 1147.91,652.22 h60; Top Overlay "4" at 1141.02,510.48 h60; Top Overlay "3" at 891.02,513.44 h60; Top Overlay "2" at 892,651.23 h60
J5: Top Overlay "8" at 1014.05,1585.48 h60; Top Overlay "7" at 856.57,1546.11 h60; Top Overlay "1" at 927.44,1676.03 h60; Top Overlay "6" at 884.13,1431.94 h60; Top Overlay "5" at 1014.05,1361.07 h60; Top Overlay "4" at 1143.97,1428 h60; Top Overlay "3" at 1179.41,1546.11 h60; Top Overlay "2" at 1112.48,1676.03 h60
J7: Bottom Overlay "1" at 1038,2313 h50
J8: Bottom Overlay "11" at 296.34,3353 h50 r180
J11: Top Overlay "1" at 575.79,835.63 h40; Top Overlay "60" at -599.41,835.63 h40; Top Overlay "REVERSE" at -167.32,1009.79 h78.74